# Altium PCB steve_breakout.PcbDoc
Units mm, origin at the board's own origin, x right, y up, seen from the top; angles counter-clockwise.
Board outline 82.91 x 56.91 mm, 2 copper layers (Top Layer, Bottom Layer); 39 components, 29 nets, 122 pads, 24 vias.
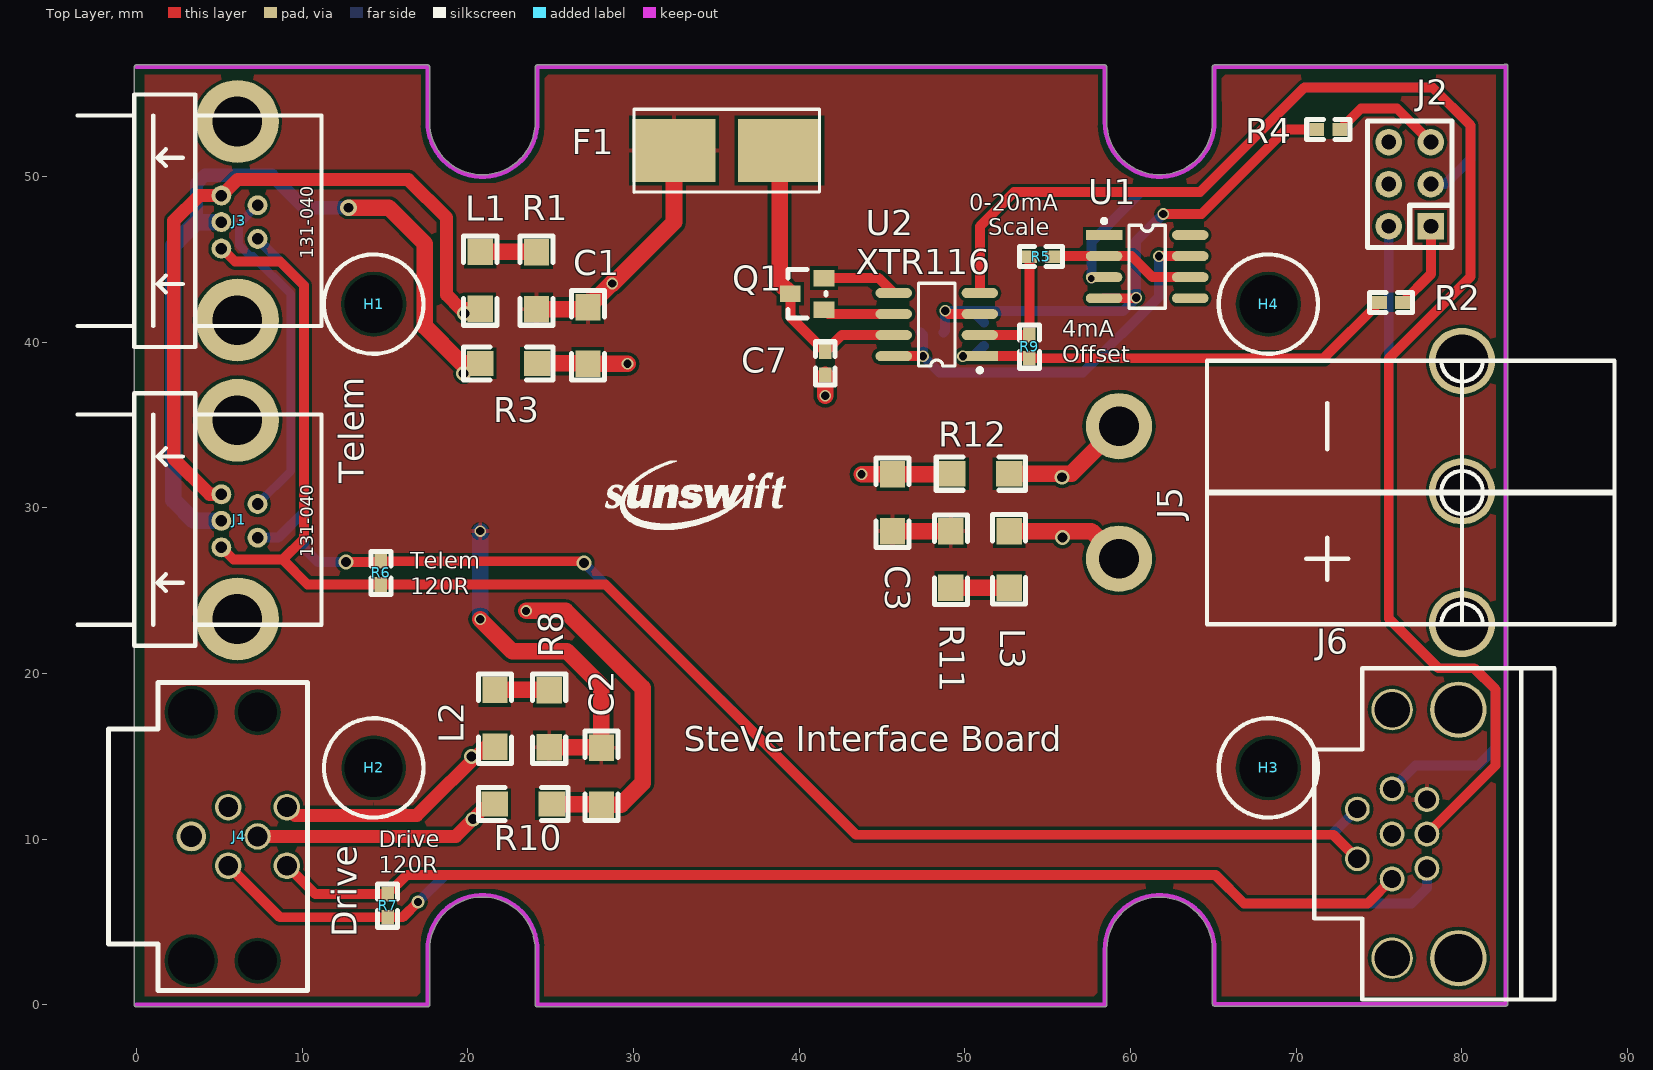
[diagram p0: Top Layer view]
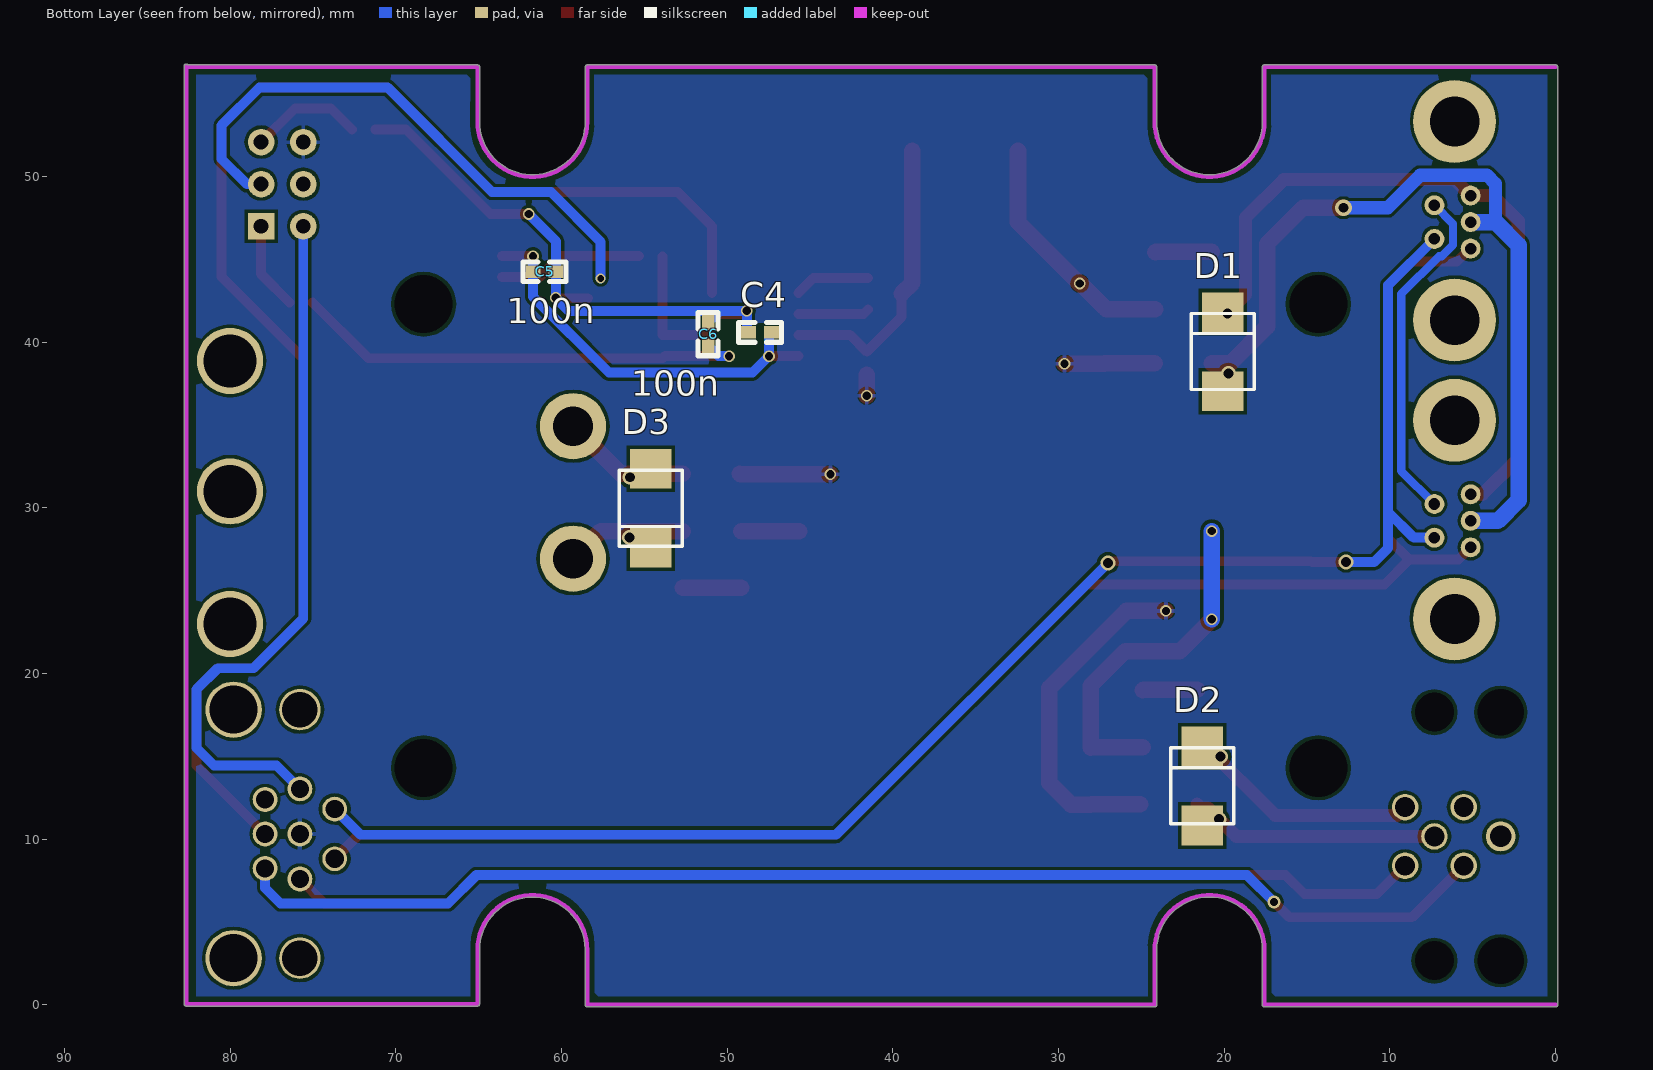
[diagram p1: Bottom Layer view, seen from below]

## Layer stack, top to bottom
Top Layer: signal copper 0.0356
Dielectric: dielectric 0.32, FR-4, Dk 4.8
Bottom Layer: signal copper 0.0356

## Board outline
-0.127,0 ccw(c0,0) 0,-0.127 17.575,-0.127 ccw(c17.575,0) 17.702,0 17.702,3.31 ccw(c17.575,3.31) 17.702,3.312 cw(c20.89,3.31) 24.078,3.312 ccw(c24.205,3.31) 24.078,3.31 24.078,0 ccw(c24.205,0) 24.205,-0.127 58.445,-0.127 ccw(c58.445,0) 58.572,0 ccw(c58.445,0) 58.571,0.017 ccw(c58.448,0.05) 58.576,0.05 58.576,3.36 ccw(c58.448,3.36) 58.573,3.384 cw(c61.76,3.31) 64.948,3.31 ccw(c65.075,3.31) 64.951,3.282 64.951,0.05 ccw(c65.078,0.05) 65.078,-0.077 82.653,-0.077 ccw(c82.653,0.05) 82.781,0.05 82.781,56.655 ccw(c82.653,56.655) 82.548,56.727 65.075,56.727 ccw(c65.075,56.6) 64.948,56.6 64.948,53.29 cw(c65.075,53.29) 64.948,53.291 64.948,53.29 cw(c61.76,53.29) 58.572,53.29 ccw(c58.445,53.29) 58.572,53.291 58.572,56.6 ccw(c58.445,56.6) 58.445,56.727 24.205,56.727 ccw(c24.205,56.6) 24.078,56.6 24.078,53.29 ccw(c24.205,53.29) 24.078,53.288 ccw(c20.89,53.29) 24.078,53.29 24.078,53.288 cw(c20.89,53.29) 17.702,53.29 ccw(c17.575,53.29) 17.702,53.292 ccw(c17.575,53.295) 17.702,53.295 17.702,56.605 ccw(c17.575,56.605) 17.54,56.727 0,56.727 ccw(c0,56.6) -0.127,56.6

## Design rules (kind name [scope] priority, off if disabled: settings)
Clearance [All] p1: gap=0.2
Clearance Clearance_1 [InNet('C_0')] p2: gap=1
HoleSize [All] p1: absolutevalues=TRUE maxlimit=4 minlimit=0.4 maxpercent=80.000 minpercent=20.000
MinimumSolderMaskSliver [All] p1 off: minsoldermaskwidth=0.254
PolygonConnect [All] p1: connectstyle=Relief reliefconductorwidth=0.254 reliefentries=4 polygonreliefangle="90 Angle"
RoutingVias [All] p1: holewidth=0.4 width=0.8 viastyle="Through Hole" minholewidth=0.2 minwidth=0.4 maxholewidth=0.6 maxwidth=1
SMDNeckDown [All] p1 off: percent=50.000
SilkToSilkClearance [All] p1 off: silktosilkclearance=0.05
SilkscreenOverComponentPads [All] p1 off: minsilkscreentomaskgap=0.05
SolderMaskExpansion [All] p1: expansion=0.102
Width [All] p1: maxlimit=1 minlimit=0.2 preferedwidth=0.254
24 further rules are at their usual default settings.

## Classes and differential pairs
component class steve_breakout: C1 C2 C3 C4 C5 C6 C7 C? D1 D2 D3 F1 J1 J2 J3 J4 J5 J6 L1 L2 L3 Q1 R1 R2 R3 R4 R5 R6 R7 R8 R9 R10 R11 R12 R? U1 U2

## Components (designator, comment, footprint, x,y, rotation, side; value= is the part's Value field where it differs from the comment)
C1 "10u" 1206 27.254,42.113 r270 top
C2 "10u" 1206 28.067,15.516 r270 top
C3 "10u" 1206 45.644,28.591 r90 top
C4 "100n" 0603 47.32,40.589 r0 bottom
C5 "100n" 0603 61.722,44.247 r180 bottom
C6 "100n" 0603 51.156,39.776 r90 bottom
C7 "100n" 0603 41.58,39.421 r270 top
D1 "12V TVS" SMB 20.084,39.421 r90 bottom
D2 "12V TVS" SMB 21.336,13.208 r90 bottom
D3 "12V TVS" SMB 54.61,29.972 r270 bottom
F1 "FUSE" LITTELFUSE-154 35.636,51.562 r0 top
H1 "HOLE" M2.5 14.326,42.291 r0 top
H2 "HOLE" M2.5 14.326,14.3 r0 top
H3 "HOLE" M2.5 68.326,14.3 r0 top (schematic designator H2)
H4 "HOLE" M2.5 68.326,42.291 r0 top (schematic designator H2)
J1 "CON5-S" TRIAD5F 7.315,30.226 r90 top
J2 "IDC6" IDC6 78.13,46.99 r90 top
J3 "CON5-S" TRIAD5F 7.315,48.26 r90 top
J4 "CON5-S" M12_5P 7.315,10.16 r90 top
J5 "Mini PowerPole" POWERPOLE25A-2 64.643,38.862 r270 top
J6 "CON8_Breakout" M12_8p 75.794,10.312 r90 top
L1 "Ferrite" 1206 20.755,42.015 r90 top
L2 "Ferrite" 1206 21.641,15.574 r90 top
L3 "Ferrite" 1206 52.68,28.591 r270 top
Q1 "NPN Transistor" SOT23-3 41.504,41.961 r90 top
R1 "1-3R" 1206 24.155,45.415 r270 top
R2 "RES" 0603 76.429,42.393 r180 top
R3 "1-3R" 1206 20.755,38.713 r0 top
R4 "RES" 0603 72.644,52.832 r180 top
R5 "CL_SIG_BIAS" 0603 53.899,45.161 r0 top
R6 "120R" 0603 14.757,26.772 r270 top
R7 "120R" 0603 15.164,6.68 r270 top
R8 "1-3R" 1206 24.917,18.974 r270 top
R9 "CL_OFFSET_BIAS" 0603 53.899,40.421 r270 top
R10 "1-3R" 1206 21.641,12.116 r0 top
R11 "1-3R" 1206 49.162,25.162 r90 top
R12 "1-3R" 1206 52.68,32.058 r180 top
U1 "Single Opamp" SO8 61.011,44.552 r270 top
U2 "XTR116" SO8 48.311,41.056 r90 top

## Footprints (in the part's own frame and the unit in brackets; to place one, negate y for a bottom-side part, rotate by r counter-clockwise, add the part's x,y. Pads: shape width x height; smd on the part's side, far side on the other; paste and mask are expansions set on the pad)
0603 [mil]
  rect 35.43x30 smd: 1(0,0) 2(55,0)
  silkscreen extent -24,-24 79,24
1206 [mil]
  rect 62.99x60 smd: 1(0,0) 2(135,0)
  silkscreen extent -39,-39 173,39
IDC6 [mm]
  rect 1.6x1.6 hole 0.9: 1(0,0)
  round 1.6 hole 0.9: 2(0,2.54) 3(2.54,0) 4(2.54,2.54) 5(5.08,0) 6(5.08,2.54)
  silkscreen extent -1.27,-1.27 6.35,3.81
LITTELFUSE-154 [mm]
  rect 5x3.81 smd: 1(-3.185,0) 2(3.185,0)
  silkscreen extent -5.6,-2.51 5.6,2.5
M2.5 [mm]
  round 0 hole 3.5: 1(0,0)
  silkscreen extent -3,-3 3,3
M12_5P [mm] "M12 Connector"
  round 0 hole 2.35: 0(-7.5,0) 0(7.5,0)
  round 0 hole 2.8: 0(-7.5,4) 0(7.5,4)
  round 1.6 hole 1.2: 1(1.768,-1.768) 2(-1.768,-1.768) 3(-1.768,1.768) 4(1.768,1.768) 5(0,0)
  round 1.8 hole 1.3: S(0,4)
  silkscreen extent -9.3,-3 9.3,9
M12_8p [mm]
  round 3.4 hole 2.9: 0(-7.5,-4) 0(7.5,-4)
  round 2.5 hole 2.15: 0(-7.5,0) 0(7.5,0)
  round 1.5 hole 1.1: 1(-1.5,2.1) 2(1.5,2.1) 3(2.72,0) 4(2.08,-2.1) 5(0,-2.1) 6(-2.08,-2.1) 7(-2.72,0) 8(0,0)
  silkscreen extent -10,-9.8 10,4.7
POWERPOLE25A-2 [mm]
  round 4 hole 3.2: 0(0,15.367) 0(7.874,15.367) 0(15.875,15.367)
  round 4 hole 2.4: NEG(3.937,-5.334) POS(11.938,-5.334)
  silkscreen extent -0.01,-0.02 15.89,24.58
SMB [mm]
  rect 2.4x2.5 smd: A(-2.385,0) K(2.385,0)
  silkscreen extent -2.28,-1.9 2.3,1.9
SO8 [mm]
  rect 0.6x2.2 smd: 1(-1.905,-2.6)
  oval 0.6x2.2 smd: 2(-0.635,-2.6) 3(0.635,-2.6) 4(1.905,-2.6) 5(1.905,2.6) 6(0.635,2.6) 7(-0.635,2.6) 8(-1.905,2.6)
  silkscreen extent -2.88,-2.72 2.5,1.1
SOT23-3 [mm]
  rect 1x1.25 smd: 1(0,0) 2(1.905,0) 3(0.965,2.032)
  silkscreen extent -0.51,-0.13 2.41,2.16
TRIAD5F [mm]
  round 5 hole 3: 0(-6.934,1.219) 0(5.055,1.219)
  round 1.2 hole 0.7: 1(0,0) 2(0.584,2.184) 3(-1.016,2.184) 4(-2.616,2.184) 5(-2.032,0)
  silkscreen extent -8.56,-3.86 6.68,10.87

## Part data
C1 C2 C3 C4 C5 C6 C7: library part CAP, "Capacitor"
D1 D2 D3: library part ZENER1, "Zener Diode"
F1: "Fuse"
H1 H2 H3 H4: "Hole"
J1 J3 J4: "Connector, 2 pin, with shield @ S"
J2: "Connector"
J5: library part PowerPole
J6: "277-2431-ND"
L1 L2 L3: library part INDUCTOR, "Inductor"
R1 R2 R3 R4 R5 R6 R7 R8 R9 R10 R11 R12: library part RES1, "Resistor"
U2: "4-20mA Current loop transmitter"

## Via types
v1: diameter 0.7, hole 0.5, Top Layer to Bottom Layer, 13 vias
v2: diameter 0.9, hole 0.6, Top Layer to Bottom Layer, 8 vias
v3: diameter 0.8, hole 0.5, Top Layer to Bottom Layer, 1 vias
v4: diameter 1, hole 0.6, Top Layer to Bottom Layer, 1 vias
v5: diameter 0.6, hole 0.4, Top Layer to Bottom Layer, 1 vias

## Nets (pads, with @x,y where several pads share a name; then routed paths per layer and width w, separated by ;. In a path a pad name is that pad's centre, name@x,y a point inside that pad or via, vN(x,y) a via of type N, cw(c..) or ccw(c..) an arc to the next point about the centre after c; other vN are vias at no path point)
ACC_SENSE: J2.3 U1.3 | length 34.9
  Bottom Layer w0.6: v5(57.642,43.84) 57.642,46.058 60.646,49.062 64.195,49.062 70.495,55.362 78.242,55.362 80.518,53.086 80.518,51.054 78.994,49.53 J2.3
AUX_12V: D3.K J5.POS L3.1 | length 7.3
  Top Layer w1: L3.1 57.642,28.591 J5.POS
  other v2: 55.899,28.194
AUX_GND: D3.A J5.NEG R12.1 | length 7.8
  Top Layer w1: R12.1 56.442,32.058 J5.NEG
  other v2: 55.88,31.843
CAN_DRIVE_12V: D2.K J4.1 L2.1 | length 14.5
  Top Layer w0.8: J4.1 9.581,11.43 16.936,11.43 21.08,15.574 L2.1
  other v2: 20.234,14.986
CAN_H_DRIVE: J4.3 J6.6 R7.2 | length 77
  Top Layer w0.6: J4.3 8.656,5.283 R7.2 16.078,5.283 v3(16.993,6.198)
  Bottom Layer w0.6: v3(16.993,6.198) 18.618,7.823 65.151,7.823 66.853,6.121 76.962,6.121 77.894,7.053 J6.6
CAN_H_TELEM: J1.4 J3.4 J6.1 R6.2 | length 99.3
  Top Layer w0.6: J1.4 5.867,26.873 8.839,26.873 ; J3.4 5.156,45.644 5.944,44.856 8.661,44.856 10.109,43.409 10.109,28.143 8.839,26.873 ; J6.1 72.244,10.262 43.434,10.262 28.321,25.375 R6.2 10.338,25.375 8.839,26.873
CAN_L_DRIVE: J4.2 J6.7 R7.1 | length 69.2
  Top Layer w0.6: J4.2 10.795,6.68 R7.1 16.307,7.823 65.151,7.823 66.853,6.121 74.323,6.121 J6.7
CAN_L_TELEM: J1.5 J3.5 J6.2 R6.1 | length 94.7
  Top Layer w0.6: v2(12.649,26.721) 14.707,26.721 R6.1 26.924,26.772 v2(27.026,26.67)
  Bottom Layer w0.6: J1.5 8.56,28.194 10.109,29.743 ; J3.5 10.109,43.434 10.109,29.743 ; v2(12.649,26.721) 10.947,26.721 10.109,27.559 10.109,29.743 ; v2(27.026,26.67) 43.434,10.262 72.143,10.262 J6.2
CAN_SIG_BYPASS: J1.1 J3.1 | length 20.7
  Bottom Layer w0.5: J1.1 9.322,32.233 9.322,42.901 7.044,45.178 6.88,45.178 6.198,45.861 6.198,47.142 J3.1
CAN_TELEM_12V: D1.K J1.2 J3.2 L1.1 | length 43.6
  Top Layer w0.8: J1.2 4.42,30.81 2.261,32.969 2.261,47.32 3.785,48.844 J3.2 6.096,49.809 16.408,49.809 18.72,47.498 18.72,42.85 19.554,42.015 L1.1
  other v2: 19.812,41.721
CL: J6.5 U2.4 | length 88.5
  Top Layer w0.6: U2.4 50.911,46.99 52.983,49.062 64.195,49.062 70.495,55.362 78.242,55.362 80.518,53.086 80.518,43.942 75.59,39.014 75.59,23.317 78.595,20.312 80.754,20.312 82.026,19.04 82.026,14.445 J6.5
CL_I_IN: R5.1 R9.1 U2.2 | length 7.7
  Top Layer w0.6: U2.2 R9.1 R5.1
CL_Q_B: Q1.1 U2.6 | length 4.3
  Top Layer w0.6: Q1.1 41.773,41.691 U2.6
CL_Q_E: Q1.2 U2.5 | length 4.6
  Top Layer w0.6: Q1.2 44.806,43.866 U2.5
CL_REF: C6.1 R2.2 R9.2 U2.1 | length 28.1
  Top Layer w0.6: v1(49.89,39.151) U2.1 53.772,39.151 R9.2 71.663,39.024 R2.2
  Bottom Layer w0.6: v1(49.89,39.151) 50.53,39.151 C6.1
CL_REG: C4.1 C5.1 U1.7 U2.8 | length 24.2
  Top Layer w0.6: U2.8 v1(47.482,39.151) ; v1(61.722,45.187) U1.7
  Bottom Layer w0.6: C4.1 47.482,40.427 v1(47.482,39.151) 48.476,38.157 57.142,38.157 61.722,42.737 C5.1 v1(61.722,45.187)
CL_RTN: C4.2 C5.2 C6.2 R4.2 U1.4 U2.3 | length 35.4
  Top Layer w0.6: v1(48.819,41.885) 49.012,41.691 U2.3 ; U1.4 v1@60.325,42.647 ; v1(61.976,47.73) 64.291,47.73 69.393,52.832 R4.2
  Bottom Layer w0.6: C4.2 48.819,40.691 v1(48.819,41.885) 50.444,41.885 ; C6.2 50.444,41.885 ; v1(61.976,47.73) 60.325,46.079 C5.2 60.325,42.697 v1(60.35,42.672) 59.563,41.885 50.444,41.885
CUTOUT: J2.2 J6.3 | length 42.7
  Bottom Layer w0.6: J2.2 75.59,23.317 78.595,20.312 80.754,20.312 82.026,19.04 82.026,15.494 80.977,14.445 77.206,14.445 J6.3
DRIVE_GND: D2.A J4.5 R10.1 | length 15.1
  Top Layer w0.8: J4.5 19.279,10.16 20.981,11.862 21.387,11.862 R10.1
  other v2: 20.32,11.201
NetJ2_1: J2.1 R2.1 | length 5.3
  Top Layer w0.6: R2.1 78.13,44.094 J2.1
NetJ2_5: J2.5 R4.1 | length 6.9
  Top Layer w0.6: R4.1 73.914,54.102 76.098,54.102 J2.5
NetL1_2: L1.2 R1.1 | length 3.4
  Top Layer w1: L1.2 24.126,45.444 R1.1
NetL2_2: L2.2 R8.1 | length 3.3
  Top Layer w1: L2.2 24.888,19.003 R8.1
NetL3_2: L3.2 R11.1 | length 3.5
  Top Layer w1: R11.1 L3.2
OPAMP_FB: R5.2 U1.2 U1.6 | length 8.8
  Top Layer w0.6: R5.2@55.321,45.187 U1.2 60.071,45.187 61.341,43.917 U1.6
TELEM_GND: D1.A J1.3 J3.3 R3.1 | length 49.5
  Top Layer w1: v4(12.802,48.108) 15.24,48.108 17.415,45.933 17.415,40.939 19.64,38.713 R3.1
  Bottom Layer w0.8: 3.632,47.244 3.632,49.555 4.14,50.063 8.179,50.063 10.135,48.108 v4(12.802,48.108)
  Bottom Layer w1: J1.3 3.48,29.21 2.235,30.455 2.235,45.847 3.632,47.244 J3.3
  other v2: 19.755,38.1
WHEEL_12V: C1.1 C2.1 C3.1 F1.1 J6.4 R1.2 R8.2 R11.2 | length 39.5
  Top Layer w1: v1(20.752,23.266) 22.682,21.336 25.984,21.336 28.067,19.253 C2.1 28.038,15.545 R8.2 ; R1.2 27.127,41.986 C1.1 28.677,43.536 v1(28.727,43.536) 28.753,43.536 32.451,47.234 F1.1 ; C3.1 R11.2
  Bottom Layer w1: v1(20.752,23.266) v1(20.752,28.591)
WHEEL_12V_FUSED: C7.1 F1.2 Q1.3 U2.7 | length 17.8
  Top Layer w0.6: Q1.3 39.472,41.529 C7.1 42.58,40.421 U2.7
  Top Layer w1: F1.2 38.821,43.576 Q1.3
WHEEL_GND: C1.2 C2.2 C3.2 C7.2 J2.6 J6.8 R3.2 R10.2 R12.2 | length 33
  Top Layer w1: v1(23.52,23.774) 25.908,23.774 30.556,19.126 30.556,13.386 29.257,12.087 C2.2 28.038,12.116 R10.2 ; R3.2 27.225,38.713 C1.2 v1(29.642,38.684) ; v1(41.58,36.754) C7.2 ; v1(43.772,32.02) C3.2 49.213,32.02 R12.2
pads on no net: H1.1 H2.1 H3.1 H4.1 J1.0 J2.4 J3.0 J4.0 J4.4 J4.S J5.0 J6.0 U1.1 U1.5 U1.8

## Polygon pours and split planes (outlines as drawn)
WHEEL_GND on Bottom Layer "GND_PLANE" (solid, pour order 3): 0.508,56.134 82.042,56.134 82.042,0.524 82.026,0.508 0.508,0.508
WHEEL_12V on Top Layer "12V_PLANE" (solid, pour order 4): 0.508,56.134 82.042,56.134 82.042,0.524 82.026,0.508 0.508,0.508

## Keep-outs
Keep-Out Layer:
  lines w0.254: 0,0 17.575,0 17.575,3.31 cw(c20.89,3.31) 24.205,3.31 ; 0,56.6 17.575,56.6 ; 17.575,53.29 ccw(c20.89,53.29) 24.205,53.29 ; 17.575,53.295 17.575,56.605 ; 24.205,3.31 24.205,0 58.445,0 ; 24.205,53.29 24.205,56.6 58.445,56.6 58.445,53.29 ccw(c61.76,53.29) 65.075,53.29 65.075,56.6 82.65,56.6 ; 58.445,3.31 cw(c61.76,3.31) 65.075,3.31 ; 58.448,0.05 58.448,3.36 ; 65.078,3.36 65.078,0.05 82.653,0.05 82.653,56.655

## Other copper
Top Layer:
  pour cut-out: 17.13,-0.7 17.13,3.52 cw(c20.61,3.52) 20.61,7 21.15,7 cw(c21.15,3.52) 24.63,3.52 24.63,-0.7
  pour cut-out: 58.003,-0.65 58.003,3.57 cw(c61.483,3.57) 61.483,7.05 62.023,7.05 cw(c62.023,3.57) 65.503,3.57 65.503,-0.65
  pour cut-out: 65.52,57.3 65.52,53.08 cw(c62.04,53.08) 62.04,49.6 61.5,49.6 cw(c61.5,53.08) 58.02,53.08 58.02,57.3
  pour cut-out: 24.65,57.3 24.65,53.08 cw(c21.17,53.08) 21.17,49.6 20.63,49.6 cw(c20.63,53.08) 17.15,53.08 17.15,57.3
Bottom Layer:
  pour cut-out: 17.13,-0.7 17.13,3.52 cw(c20.61,3.52) 20.61,7 21.15,7 cw(c21.15,3.52) 24.63,3.52 24.63,-0.7
  pour cut-out: 24.65,57.3 24.65,53.08 cw(c21.17,53.08) 21.17,49.6 20.63,49.6 cw(c20.63,53.08) 17.15,53.08 17.15,57.3
  pour cut-out: 65.52,57.3 65.52,53.08 cw(c62.04,53.08) 62.04,49.6 61.5,49.6 cw(c61.5,53.08) 58.02,53.08 58.02,57.3
  pour cut-out: 58.003,-0.65 58.003,3.57 cw(c61.483,3.57) 61.483,7.05 62.023,7.05 cw(c62.023,3.57) 65.503,3.57 65.503,-0.65

## Silkscreen, mask and mechanical layers (free items; w line width, h text height)
Top Overlay:
  drawing of 1659 lines, arcs and shapes, not listed
  text "0-20mA" at 50.267,47.93 h1
  text "Scale" at 51.433,46.457 h1
  text "4mA" at 55.899,40.332 h1
  text "Offset" at 55.88,38.771 h1
  text "Telem" at 13.716,31.485 h1.52 r90
  text "Telem" at 16.535,26.314 h1
  text "120R" at 16.535,24.79 h1
  text "SteVe Interface Board" at 33.026,15.314 h1.52
  text "Drive" at 14.63,9.5 h1
  text "120R" at 14.63,7.976 h1
  text "Drive" at 13.305,4.064 h1.52 r90
Mechanical 1:
  lines w0.254: 17.575,53.29 ccw(c20.89,53.29) 24.205,53.29 ; 17.575,53.295 17.575,56.605 ; 17.575,56.6 0,56.6 0,0 17.575,0 17.575,3.31 cw(c20.89,3.31) 24.205,3.31 ; 24.205,3.31 24.205,0 58.445,0 ; 24.205,53.29 24.205,56.6 58.445,56.6 58.445,53.29 ccw(c61.76,53.29) 65.075,53.29 65.075,56.6 82.65,56.6 ; 58.445,3.31 cw(c61.76,3.31) 65.075,3.31 ; 58.448,0.05 58.448,3.36 ; 65.078,3.36 65.078,0.05 82.653,0.05 82.653,56.655

## Text inside footprints (layer, text, board x,y; h text height)
J1: Top Overlay "131-040" at 10.668,27 h0.76 r90
J3: Top Overlay "131-040" at 10.668,45.034 h0.76 r90